# EAGLE board lpc1347_refboard (EAGLE 6.4)
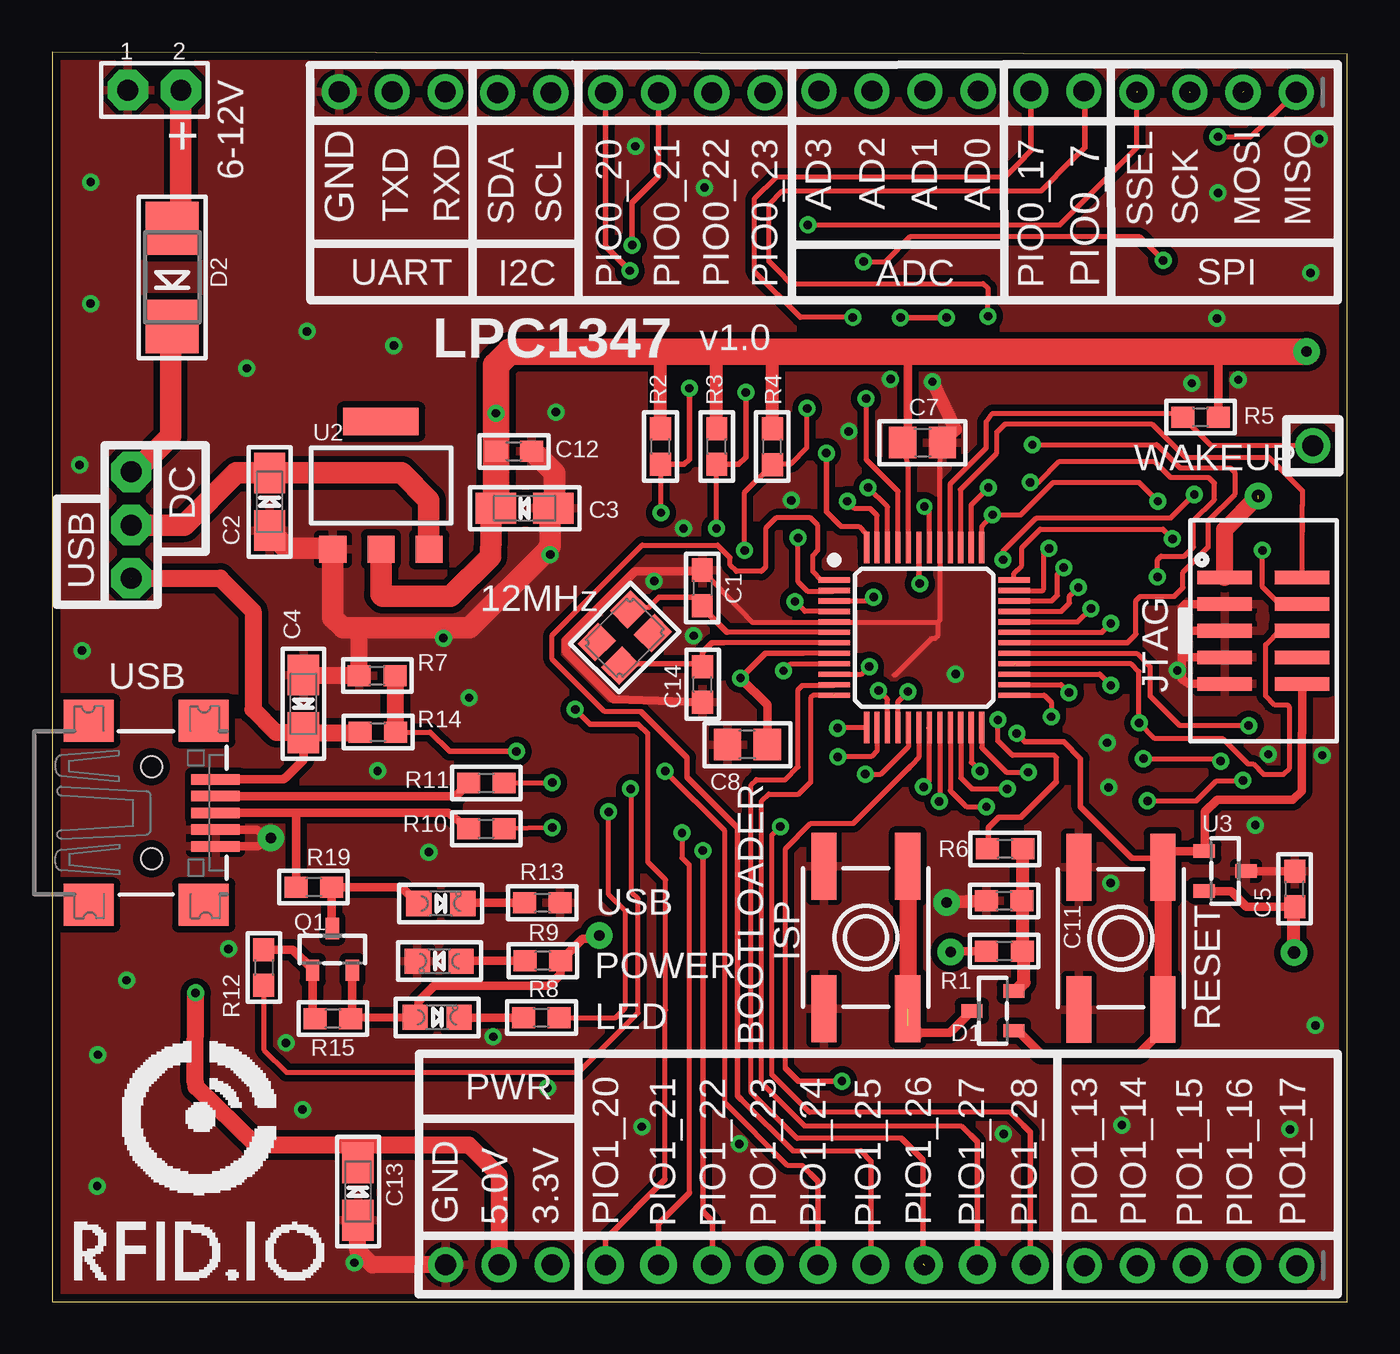
[diagram p0: board, top side]
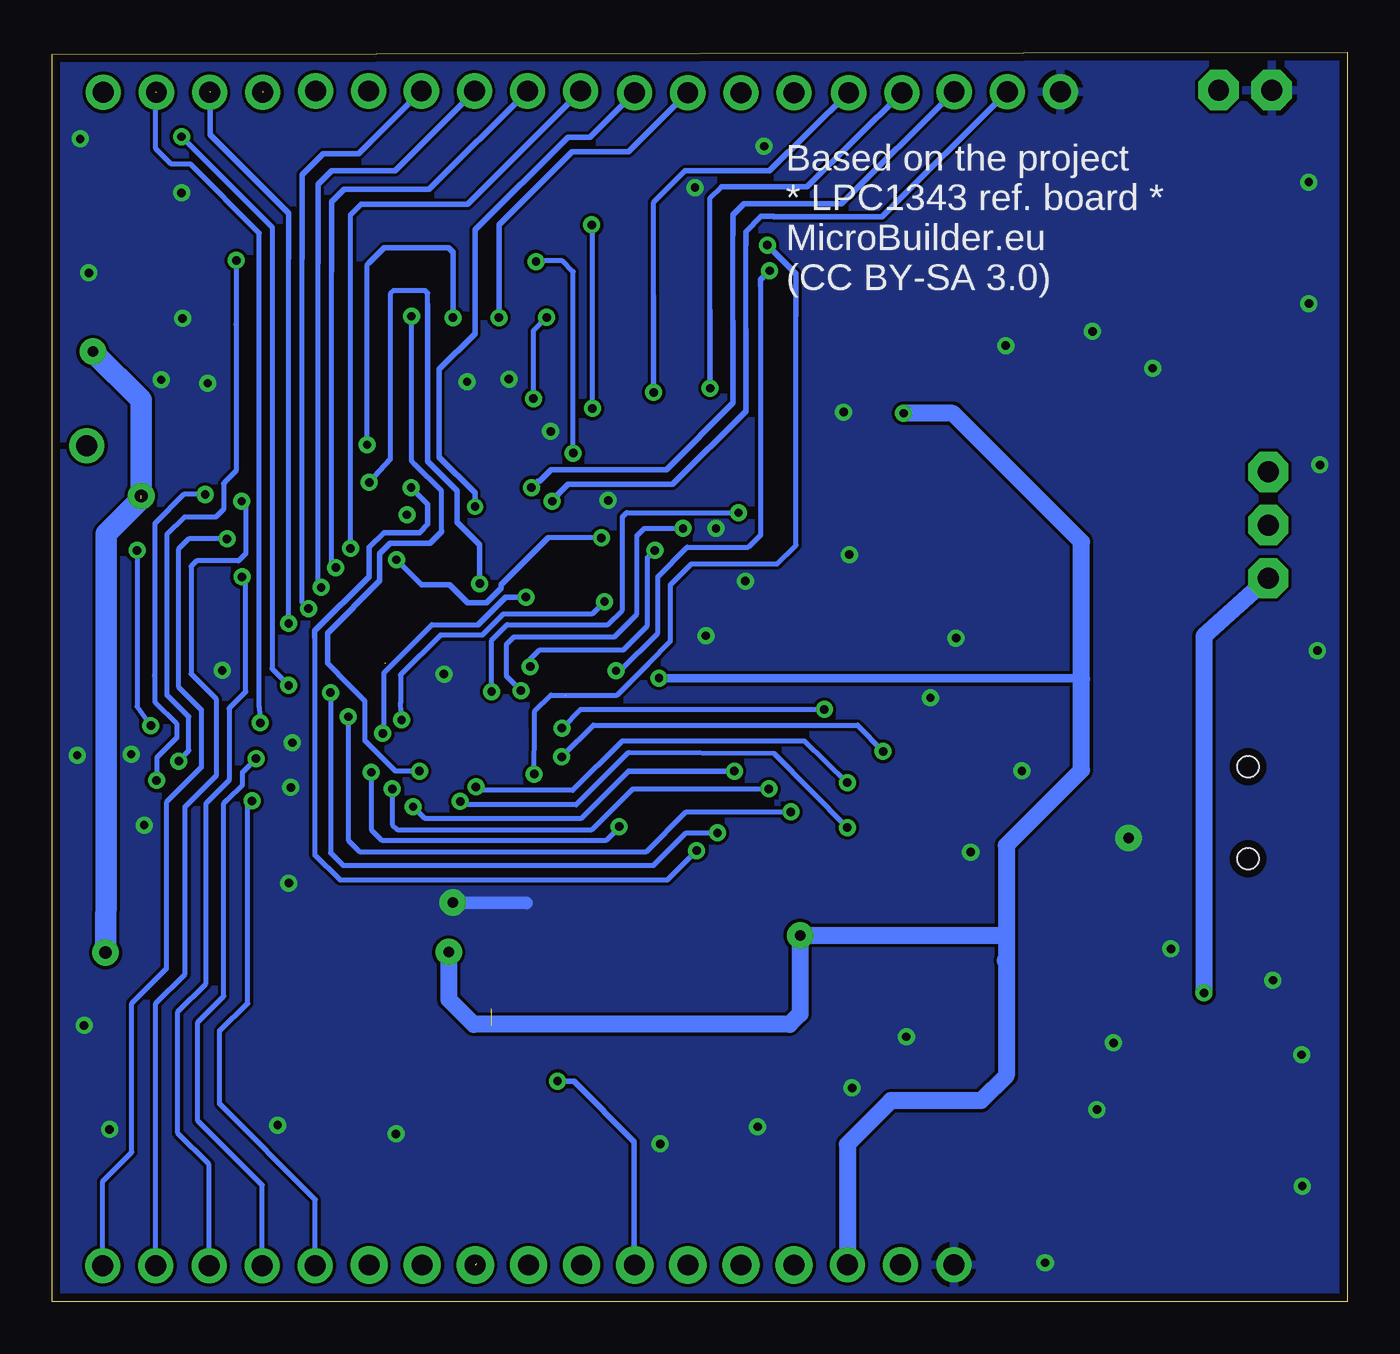
[diagram p1: board, bottom side, seen from below]

Size 61.9 x 59.7 mm. Coordinates in mm from the lower left corner, seen from the top.
Outline: 61.9,0 61.9,59.6 0,59.7 0,0 61.9,0
Copper layers (1*16): Top 0.0356mm / dielectric 1.5011mm / Bottom 0.0356mm
Design rules "oshpark.com": minimum track width 6mil, minimum drill 13mil, track to track 6mil, track to pad 6mil, pad to pad 6mil, via to via 6mil, smd to smd 6mil, copper to edge 15mil, drill to drill 6mil, minimum pad ring 7mil, minimum via ring 7mil, stop-mask expansion 4mil, vias tented up to drill 0mil, thermal gap 10mil

## Footprints (pad centres in the part's own frame; a part is rotated, then mirrored left to right if it is on the bottom)
EVQ-Q2 = smd 3.2 x 1.2: A -3.4,-2; A' 3.4,-2; B -3.4,2; B' 3.4,2
0603 = smd 1.1 x 1: 1 -0.85,0; 2 0.85,0
EIA3216-18/A-R = smd 1.95 x 1.5: + 1.375,0; - -1.375,0
0805 = smd 1.3 x 1.5: 1 -0.95,0; 2 0.95,0
USB-MINIB = smd 0.5 x 2.308: D+ 0,4.064; D- -0.8,4.064; GND 1.6,4.064; ID 0.8,4.064; VBUS -1.6,4.064 | smd 2 x 2.4: GND1 -4.4,-2; GND2 -4.4,3.5; GND3 4.4,3.5; GND4 4.4,-2 | hole 1: -2.2,1; 2.2,1
SOT23-R = smd 0.635 x 1.016: 1 -0.95,-1; 2 0.95,-1; 3 0,1
SMADIODE = smd 2.54 x 2.54: A 2.349,0; C -2.349,0
1X03_ROUND = drill 1 pad 1.676: 1 -2.54,0; 2 0,0; 3 2.54,0
1X04_ROUND = drill 1 pad 1.676: 1 -3.81,0; 2 -1.27,0; 3 1.27,0; 4 3.81,0
1X02_ROUND = drill 1 pad 1.676: 1 -1.27,0; 2 1.27,0
1X01_ROUND = drill 1 pad 1.676: 1 0,0
1X05_ROUND = drill 1 pad 1.676: 1 -5.08,0; 2 -2.54,0; 3 0,0; 4 2.54,0; 5 5.08,0
JUMPER2 = drill 1 pad 1.93 octagon: 1 2.54,0; 2 0,0
1X09_ROUND_70 = drill 1 pad 1.778: 1 -10.16,0; 2 -7.62,0; 3 -5.08,0; 4 -2.54,0; 5 0,0; 6 2.54,0; 7 5.08,0; 8 7.62,0; 9 10.16,0
JUMPER3 = drill 1 pad 1.93 octagon: 1 -2.54,0; 2 0,0; 3 2.54,0
2X05_1.27MM_SMT = smd 0.65 x 2.6: 1 -2.54,-1.85; 2 -2.54,1.85; 3 -1.27,-1.85; 4 -1.27,1.85; 5 0,-1.85; 6 0,1.85; 7 1.27,-1.85; 8 1.27,1.85; 9 2.54,-1.85; 10 2.54,1.85
CHIPLED_0805 = smd 1.2 x 1.2: A 0,-1.05; C 0,1.05
SOT223-R = smd 1.3 x 1.3: 1 -2.3,-3.05; 2 0,-3.05; 3 2.3,-3.05 | smd 3.6 x 1.3: 4 0,3.05
LQFP48 = smd 1.5 x 0.25: 1 -4.3,2.75; 2 -4.3,2.25; 3 -4.3,1.75; 4 -4.3,1.25; 5 -4.3,0.75; 6 -4.3,0.25; 7 -4.3,-0.25; 8 -4.3,-0.75; 9 -4.3,-1.25; 10 -4.3,-1.75; 11 -4.3,-2.25; 12 -4.3,-2.75; 25 4.3,-2.75; 26 4.3,-2.25; 27 4.3,-1.75; 28 4.3,-1.25; 29 4.3,-0.75; 30 4.3,-0.25; 31 4.3,0.25; 32 4.3,0.75; 33 4.3,1.25; 34 4.3,1.75; 35 4.3,2.25; 36 4.3,2.75 | smd 0.25 x 1.5: 13 -2.75,-4.3; 14 -2.25,-4.3; 15 -1.75,-4.3; 16 -1.25,-4.3; 17 -0.75,-4.3; 18 -0.25,-4.3; 19 0.25,-4.3; 20 0.75,-4.3; 21 1.25,-4.3; 22 1.75,-4.3; 23 2.25,-4.3; 24 2.75,-4.3; 37 2.75,4.3; 38 2.25,4.3; 39 1.75,4.3; 40 1.25,4.3; 41 0.75,4.3; 42 0.25,4.3; 43 -0.25,4.3; 44 -0.75,4.3; 45 -1.25,4.3; 46 -1.75,4.3; 47 -2.25,4.3; 48 -2.75,4.3
CRYSTAL_3.2X2.5 = smd 1.4 x 1.2: 1 -1.1,-0.8; 2 1.1,0.8; GND1 -1.1,0.8; GND2 1.1,-0.8

## Placement (x,y rotation side)
BTN1  Reset  [EVQ-Q2]  51.08,17.36 270 top
BTN2  ISP  [EVQ-Q2]  38.89,17.4 270 top
C1  16pF  [0603]  31.07,34.11 270 top
C2  10µF  [EIA3216-18/A-R]  10.39,38.22 90 top
C3  10µF  [EIA3216-18/A-R]  22.58,37.91 180 top
C4  10µF  [EIA3216-18/A-R]  12,28.57 270 top
C5  0.1µF  [0603]  59.39,19.72 90 top
C7  10µF  [0805]  41.6,41.05 0 top
C8  10µF  [0805]  33.23,26.62 180 top
C11  0.1µF  [0603]  45.5,19.15 180 top
C12  0.1µF  [0603]  22.06,40.63 0 top
C13  10µF  [EIA3216-18/A-R]  14.61,5.26 90 top
C14  16pF  [0603]  31.09,29.49 90 top
CN1  USBMINIB  [USB-MINIB]  3.74,23.36 270 top
D1  BAT54C  [SOT23-R]  44.96,13.89 90 top
D2  MULTICOMPSS12  [SMADIODE]  5.74,48.95 90 top
JP1  PWR  [1X03_ROUND]  21.35,1.77 180 top
JP2  ADC  [1X04_ROUND]  40.45,57.85 180 top
JP3  SPI  [1X04_ROUND]  55.65,57.79 180 top
JP4  I2C  [1X02_ROUND]  22.56,57.77 180 top
JP5  UART  [1X03_ROUND]  16.25,57.81 0 top
JP6  WAKEUP  [1X01_ROUND]  60.25,40.9 90 top
JP7  [1X04_ROUND]  30.25,57.78 180 top
JP9  [1X05_ROUND]  54.41,1.72 180 top
JP10  [JUMPER2]  6.15,57.9 180 top
JP11  [1X09_ROUND_70]  36.6,1.75 0 top
JP12  POWERSOURCE  [JUMPER3]  3.77,37.11 90 top
JP13  [1X02_ROUND]  48.05,57.85 0 top
JTAG1  JTAG  [2X05_1.27MM_SMT]  57.9,32.06 270 top
LED1  POWER  [CHIPLED_0805]  18.5,16.27 90 top
LED2  2mA  [CHIPLED_0805]  18.4,13.59 270 top
LED3  USB  [CHIPLED_0805]  18.57,19.03 270 top
Q1  MMBT2907A  [SOT23-R]  13.39,16.83 0 top
R1  20K  [0603]  45.51,16.75 180 top
R2  10K  [0603]  29.08,40.86 90 top
R3  10K  [0603]  31.76,40.86 90 top
R4  10K  [0603]  34.42,40.85 90 top
R5  10K  [0603]  54.88,42.27 0 top
R6  1K  [0603]  45.54,21.63 180 top
R7  100K  [0603]  15.53,29.92 0 top
R8  1.0K  [0603]  23.38,13.57 0 top
R9  150  [0603]  23.45,16.29 180 top
R10  33  [0603]  20.74,22.6 0 top
R11  33  [0603]  20.74,24.78 0 top
R12  2K  [0603]  10.11,15.97 270 top
R13  150  [0603]  23.43,19.06 180 top
R14  10K  [0603]  15.57,27.22 0 top
R15  10K  [0603]  13.42,13.52 180 top
R19  1.5K  [0603]  12.5,19.81 180 top
U2  LM1117(3.3)  [SOT223-R]  15.71,39 0 top
U3  MCP130T  [SOT23-R]  56.06,20.58 270 top
U4  LPC1347FBD48  [LQFP48]  41.68,31.73 0 top
U$23  [RFID_IO_LOGO_1X1]  1.11,1.08 0 top
Y2  12MHz  [CRYSTAL_3.2X2.5]  27.37,31.73 45 top

## Library data of the parts
BTN1 BTN2 JP2-JP5 JP7 JP9-JP11 JP13 U4 = microbuilder (1)
C1-C5 C7 C8 C11-C14 CN1 D1 D2 JP1 JP6 JP12 JTAG1 LED1-LED3 Q1 R1-R15 R19 U2 U3 Y2 = microbuilder
U$23 = rfid.io

## Nets
3.3V: C3.+ C5.1 C7.1 C8.1 C12.1 JP1.1 JTAG1.1 LED2.A Q1.2 R1.2 R2.2 R3.2 R4.2 R5.2 R9.1 R15.1 U2.2 U3.2 U4.8 U4.44
5.0V: C4.+ C13.+ CN1.VBUS JP1.2 JP12.1 R14.1
GND: BTN1.A BTN1.A' BTN2.A BTN2.A' C1.1 C2.- C3.- C4.- C5.2 C7.2 C8.2 C11.2 C12.2 C13.- C14.1 CN1.GND CN1.ID JP1.3 JP5.1 JP10.1 JTAG1.3 JTAG1.5 JTAG1.7 JTAG1.9 LED1.C R7.1 R13.1 U2.1 U3.3 U4.5 U4.41
N$1: LED2.C R8.1
N$2: C2.+ JP12.2 U2.3
N$4: D2.A JP10.2
N$5: BTN2.B BTN2.B' D1.3
N$7: CN1.D+ R10.1 R19.2
N$8: Q1.1 R12.1 R15.2
N$9: C11.1 D1.2 R1.1 R6.1
N$10: LED1.A R9.2
N$11: LED3.C R13.2
N$12: CN1.D- R11.1
N$13: LED3.A Q1.3 R19.1
PIO0_0/RESET: BTN1.B BTN1.B' D1.1 JTAG1.10 U3.1 U4.3
PIO0_1/ISP: R6.2 U4.4
PIO0_2/SSEL: JP3.4 R4.1 U4.10
PIO0_3/USBVBUS: R7.2 R14.2 U4.14
PIO0_4/SCL: JP4.1 R3.1 U4.15
PIO0_5/SDA: JP4.2 R2.1 U4.16
PIO0_6/USBCONNECT: R12.2 U4.22
PIO0_7: JP13.2 U4.23
PIO0_8/MISO: JP3.1 U4.27
PIO0_9/MOSI/SWO: JP3.2 JTAG1.6 U4.28
PIO0_10/SWCLK: JTAG1.4 U4.29
PIO0_11/AD0: JP2.1 U4.32
PIO0_12/AD1: JP2.2 U4.33
PIO0_13/AD2: JP2.3 U4.34
PIO0_14/AD3: JP2.4 U4.35
PIO0_15/SWDIO: JTAG1.2 U4.39
PIO0_16/WAKEUP: JP6.1 R5.1 U4.40
PIO0_17: JP13.1 U4.45
PIO0_18/RXD: JP5.3 U4.46
PIO0_19/TXD: JP5.2 U4.47
PIO0_20: JP7.4 U4.9
PIO0_21: JP7.3 U4.17
PIO0_22: JP7.2 U4.30
PIO0_23: JP7.1 U4.42
PIO1_13: JP9.1 U4.36
PIO1_14: JP9.2 U4.37
PIO1_15: JP9.3 U4.43
PIO1_16: JP9.4 U4.48
PIO1_19: JP9.5 U4.2
PIO1_20: JP11.1 U4.13
PIO1_21: JP11.2 U4.26
PIO1_22: JP11.3 U4.38
PIO1_23: JP11.4 U4.18
PIO1_24: JP11.5 U4.21
PIO1_25: JP11.6 U4.1
PIO1_26: JP11.7 U4.11
PIO1_27: JP11.8 U4.12
PIO1_28: JP11.9 U4.24
PIO1_29/SCK: JP3.3 U4.31
PIO1_31/LED: R8.2 U4.25
USBD+: R10.2 U4.20
USBD-: R11.2 U4.19
VCC: D2.C JP12.3
XTALIN: C1.2 U4.6 Y2.2
XTALOUT: C14.2 U4.7 Y2.1

## Tracks (layer width: path | path; a pad name or v marks a point on that pad's centre or on a via)
3.3V  (via drill 0.4 pad 0.81, 0.5 pad 1.27, 0.6 pad 1.27)  (1 unrouted)
  Top 0.25: U4.44 40.93,39.93 C7.1 40.9,40.44 | U4.8 35.88,30.98
  Top 0.254: 40.9,45.1 40.6,45.4 | 40.9,41.29 C7.1 | 35.88,30.98 34.08,30.98 v32.9,29.8
  Top 0.406: 14.25,13.55 14.2,13.5 14.2,13.4 14.34,13.54 Q1.2 14.34,13.6 R15.1 14.31,13.57 LED2.A 17.5,13.61 17.5,14.35 18.25,15.1 23.75,15.1 24.3,15.65 R9.1 25.35,17.35 26,17.35 v26.15,17.5 | C5.1 57.08,18.87 56.35,19.6 55.09,19.6 U3.2 | C8.1 34.18,28.52 v32.9,29.8 | R5.2 55.73,45.18 55.96,45.4 | 40.9,41.29 40.9,45 41.3,45.4 | R1.2 43,16.75 v42.95,16.7
  Top 0.61: 31.85,45.4 31.76,45.31 R3.2 | R2.2 29.08,45.27 28.95,45.4 | R4.2 34.42,45.33 34.35,45.4 | v59.35,16.68 59.35,18.83 C5.1
  Top 0.813: JTAG1.1 56.05,36.9 v57.65,38.5
  Top 1.016: U2.2 15.71,33.79 15.8,33.7 19.05,33.7 20.95,35.6 21,37.71 C3.+
  Top 1.27: C12.1 v21.2,42.45 21.2,44.75 21.85,45.4 28.95,45.4 31.85,45.4 34.35,45.4 40.6,45.4 41.3,45.4 55.96,45.4 v59.96,45.4 | C3.+ C12.1 | C12.1
  Bottom 0.406: v32.9,29.8 12.75,29.8 12.7,29.75
  Bottom 0.61: 21.13,42.38 v21.2,42.45
  Bottom 0.813: 16.3,17.55 16.3,21.8 12.7,25.4 12.7,29.75 12.7,36.3 18.85,42.45 v21.2,42.45 | 16.3,17.55 16.3,16.25 | 16.3,16.25 16.3,10.8 17.5,9.6 21.82,9.6 23.9,7.52 JP1.1 | v42.95,16.7 42.95,14.45 41.75,13.25 26.65,13.25 26.15,13.75 v26.15,17.5 16.35,17.5 16.3,17.55 | 16.35,16.3 16.3,16.25
  Bottom 1.016: v59.35,16.68 59.33,20.65 59.33,36.7 57.65,38.38 57.65,43.09 v59.96,45.4
5.0V  (via drill 0.4 pad 0.81)  (1 unrouted)
  Top 0.406: CN1.VBUS 11.05,24.96 11.12,25.03 11.15,25.03 12,25.88 C4.+
  Top 0.813: JP12.1 8.03,34.57 9.6,33 9.6,28.3 10.71,27.19 C4.+ 14.69,27.19 R14.1 | v6.85,14.75 6.84,10.46 6.88,10.26 9.71,7.49 14.45,7.49 | 14.45,7.49 19.91,7.49 21.35,6.05 JP1.2 | C13.+ 14.45,6.8 14.45,7.49
  Bottom 0.813: JP12.1 6.85,31.8 v6.85,14.75
GND  (via drill 0.4 pad 0.81, 0.5 pad 1.27)
  Top 0.25: C7.2 42.43,40.07 U4.41 42.43,32.58 42.3,32.45 | 37.39,32.5 U4.5 37.41,32.45 | 40.25,29.95 40.3,29.95 42.05,31.7 42.2,31.7 42.35,31.85 42.35,32.4 42.3,32.45 | 37.41,32.45 33.49,32.45 C1.1 | 42.3,32.45 37.41,32.45
  Top 0.406: JTAG1.3 54.13,33.33 54,33.15 54,32.05 | 54,32.05 56.04,32.05 JTAG1.5 | JTAG1.9 54.33,29.52 54,29.75 54,30.8 | 54,30.8 54,32.05 | JTAG1.7 54.01,30.79 54,30.8 | U3.3 59.38,20.58 C5.2 | CN1.GND 9.81,21.76 v10.44,22.16 9.77,22.56 CN1.ID | C14.1 26.83,28.77 24.55,31.05 24.55,31.6 27.85,34.9 31.04,34.9 C1.1
  Top 0.61: 14.87,32.11 14.96,32.2 | C11.2 43.69,19.11 v42.76,19.08 | v42.08,43.96 43.18,41.67 C7.2
  Top 0.813: C4.- 14.65,29.94 R7.1 14.68,31.92 14.87,32.11 | C13.- 14.6,3.07 14.6,2.45 15.29,1.76 JP1.3
  Top 1.016: C2.- 10.39,36.81 11.2,36 13.37,36 U2.1 13.41,32.69 13.9,32.2 14.96,32.2 19.95,32.2 23.5,35.75 23.8,36.1 23.8,37.76 C3.- | 24,37.87 C3.- | C12.2 22.97,40.63 24,39.6 24,37.96 C3.-
  Bottom 0.61: v42.76,19.08 39.25,19.05
  other vias: 9.3,44.6 23.8,35.7 30.66,31.82 60.71,26.11 60.38,13.2 51.13,8.44 50.59,20 57.51,22.77 32.85,7.54 2.15,5.52 14.44,1.86 2.18,11.8 21.07,12.66 18,21.48 3.55,15.36 11.96,9.18 8.42,16.86 11.17,12.36 28.77,34.44 15.55,25.36 19.93,28.86 1.43,31.11 1.3,39.98 1.82,47.69 1.83,53.5 60.57,55.57 16.32,45.69 12.17,46.36 38.08,41.59 30.18,36.95 24.07,42.51 55.68,46.98 18.7,31.71 60.15,49.16 43.18,29.98 53.78,30.16 50.43,26.71 58.13,26.16 54.48,43.89 55.73,52.98 40.08,44.09 35.33,38.29 23.67,10.21 28.18,8.36 59.16,8.23 45.47,8.01 50.5,24.57 31.18,53.23 27.88,55.21 56.7,44.05
  pour Top (isolate 0.305): 0.4,0.35 61.45,0.35 61.45,59.15 0.4,59.15
  pour Bottom: 0.4,0.35 61.45,0.35 61.45,59.15 0.4,59.15
N$1
  Top 0.406: R8.1 19.57,13.57 LED2.C
N$2
  Top 1.016: U2.3 18,35.87 18,38.3 16.7,39.6 C2.+ 8.8,39.6 6.31,37.11 JP12.2
N$4
  Top 1.016: 5.75,50.9 5.6,50.75 5.6,51.16 D2.A 6.15,51.71 JP10.2
N$5  (1 unrouted)
  Top 0.406: 41.23,12.84 42.91,12.84 D1.3
  Top 0.813: BTN2.B 40.89,13.19 41.23,12.84
N$7
  Top 0.406: CN1.D+ 11.63,23.36 | 11.63,23.36 18.93,23.36 R10.1 | R19.2 11.65,23.34 11.63,23.36
N$8
  Top 0.406: R12.1 11.5,16.82 12.44,15.88 Q1.1 12.44,13.65 R15.2
N$9
  Top 0.61: 46.45,16.83 R1.1 | 46.46,16.85 R1.1 | D1.2 46.04,14.84 46.45,15.25 46.45,16.66 R1.1 | R6.1 46.36,21.63 46.36,19.15 | R1.1 46.36,19.15 | C11.1 46.36,19.15
N$10
  Top 0.406: R9.2 19.57,16.29 LED1.A
N$11
  Top 0.406: R13.2 19.65,19.06 LED3.C
N$12
  Top 0.406: CN1.D- 19.27,24.16 R11.1
N$13
  Top 0.406: Q1.3 13.35,17.87 R19.1 16.7,19.8 17.47,19.03 LED3.A
PIO0_0/RESET  (via drill 0.4 pad 0.81)
  Top 0.25: U4.3 39.08,33.48 v39.26,33.67
  Top 0.254: v46.1,27.15 46.5,26.75 48.35,26.75 49.15,25.95 49.15,23.65 51.6,21.2 52.64,21.2 BTN1.B
  Top 0.406: 53.38,21.53 U3.1 55.1,21.56 55.1,23.4 55.68,23.98 59.3,23.98 59.72,24.4 59.72,27.17 59.75,27.2 JTAG1.10 | D1.1 46.16,12.94 47.25,11.85 51.94,11.85 53.08,12.99 BTN1.B' | 52.72,21.53 53.38,21.53 | 53.38,21.53 53.39,21.52 52.93,21.52 BTN1.B
  Top 0.813: 53.05,20.91 BTN1.B BTN1.B'
  Bottom 0.25: v46.1,27.15 46.05,27.2 46.05,30.05 43.75,32.35 41.55,32.35
  Bottom 0.254: 39.33,33.67 v39.26,33.67 40.23,33.67 41.55,32.35
PIO0_1/ISP  (via drill 0.4 pad 0.81)
  Top 0.25: U4.4 35.97,32.98 v35.5,33.45 | 48,24.85 48,26 47.9,26.1 45.9,26.1 45.2,26.8 v45.2,27.8
  Top 0.254: 48,24.85 46.3,23.15 45.25,23.15 44.75,22.65 44.75,21.69 R6.2
  Top 0.305: R6.2 44.85,21.79
  Bottom 0.25: v35.5,33.45 36.1,32.85 40.35,32.85 41.35,31.85 43.35,31.85 45.25,29.95 45.25,28.6 v45.2,27.8
PIO0_2/SSEL  (via drill 0.4 pad 0.81)  (1 unrouted)
  Top 0.25: U4.10 38.68,29.98 v39.05,30.35 | v33.1,35.9 33.1,38.68 R4.1 34.47,40.05 35.33,40.05 36.07,40.79 36.07,42.67 v36.08,42.68 | v36.11,51.45 48.17,51.45 51.85,55.13 51.85,57.84
  Bottom 0.25: v39.05,30.35 39.05,30.7 38.6,31.15 34.6,31.15 33.45,32.3 33.45,35.55 v33.1,35.9 | v36.08,42.68 36.08,51.42 v36.11,51.45
PIO0_3/USBVBUS  (via drill 0.4 pad 0.81)
  Top 0.25: R14.2 18.06,27.22 | U4.14 39.43,26.33 39.15,26.05 37.57,26.05 v37.55,26.03
  Top 0.254: 18.06,27.22 18.99,26.29 v22.19,26.29
  Top 0.813: R7.2 16.38,27.26 R14.2
  Bottom 0.25: v22.19,26.29 23.4,27.55 36.03,27.55 v37.55,26.03
PIO0_4/SCL  (via drill 0.4 pad 0.81)
  Top 0.25: 39.9,27.41 U4.15 | 39.92,27.28 U4.15 | U4.15 39.93,28.77 v39.5,29.2 | v31.75,36.95 31.75,40 R3.1
  Top 0.254: R3.1 32.81,40.01 33.15,40.35 v33.15,43.45
  Bottom 0.25: v31.75,36.95 33.6,36.95 33.95,36.6 33.95,32.85 35.05,31.75 39.85,31.75 40.2,31.4 40.2,29.9 v39.5,29.2 | 33.15,48.05 33.15,52.53 31.65,54.03
  Bottom 0.254: v33.15,43.45 33.15,48.05 | 31.65,54.03 27.63,54.03 JP4.1
PIO0_5/SDA  (via drill 0.4 pad 0.81)
  Top 0.25: 40.43,27.41 U4.16 40.43,28.68 v40.9,29.15 | v29.1,37.7 29.1,39.98 R2.1
  Top 0.254: R2.1 30.21,40.01 30.45,40.25 v30.45,43.65
  Bottom 0.25: v40.9,29.15 40.9,31.6 40.15,32.35 35.35,32.35 34.65,33.05 34.65,37.5 34.45,37.7 v29.1,37.7 | 30.45,47.35 30.45,52.74 29.91,53.28
  Bottom 0.254: v30.45,43.65 30.45,47.35 | 29.91,53.28 25.84,53.28 JP4.2
PIO0_6/USBCONNECT  (via drill 0.4 pad 0.81)
  Top 0.25: R12.2 10.11,12.04 11.2,10.95 25.15,10.95 28,13.8 28,19.25 27.7,19.55 27.7,24.45 v27.65,24.5 | U4.22 43.43,25.02 43.95,24.5 v45.65,24.5
  Bottom 0.25: v27.65,24.5 34.15,24.5 36.1,22.55 45.4,22.55 45.65,22.8 v45.65,24.5
PIO0_7  (via drill 0.4 pad 0.81)
  Top 0.25: U4.23 43.93,25.77 v44.35,25.35 | 48.75,54.56 47.27,53.08 34.91,53.08 34.25,52.42 34.25,49.71 34.99,48.97 34.99,48.96 35.31,48.64 44.49,48.64 44.74,48.4 v44.73,47.09
  Top 0.254: 48.75,54.56 48.76,54.56 49.35,55.15 49.35,57.82 JP13.2
  Bottom 0.25: v44.35,25.35 45.5,25.35 46.95,26.8 46.95,28.7 47.73,29.47 47.78,29.53 | 43.3,36.83 43.3,38.75 44.55,40 44.73,40.18 44.73,47.13 v44.73,47.09
  Bottom 0.254: 43.3,36.83 43.3,36.8 43.85,36.25 45.75,36.25 46.25,35.75 46.25,34.45 48.75,31.95 48.75,30.5 47.73,29.47
PIO0_8/MISO  (via drill 0.4 pad 0.81)
  Top 0.25: U4.27 50.07,29.98 v50.6,29.45 | 59.47,57.81 JP3.1 57.27,55.66 v55.72,55.66
  Bottom 0.25: 51.39,30.23 51.4,30.25 | v55.72,55.66 51.56,51.5 51.55,51.5 51.39,51.33 51.39,30.23 | 51.39,30.23 v50.6,29.45
PIO0_9/MOSI/SWO  (via drill 0.4 pad 0.81)  (2 unrouted)
  Top 0.25: 45.99,30.5 U4.28 | JTAG1.6 58.66,32.06 58,31.4 58,28.95 58.45,28.5 59.05,28.5 59.15,28.4 59.15,25.5 58.85,25.2 57.9,25.2 57.4,25.7 57.15,25.7 55.95,26.9 52.71,26.9 v51.96,27.65 51.95,27.8 51.95,30.1 51.58,30.48 46.01,30.48
  Bottom 0.25: v51.96,27.65 52,28.41 52,51.06 55.3,54.36 56.21,54.36 56.95,55.09 56.95,57.82
PIO0_10/SWCLK  (via drill 0.4 pad 0.81)
  Top 0.25: JTAG1.4 58.57,33.33 58.57,33.43 57.85,34.15 v57.85,35.9 | U4.29 51.84,30.98 52.47,30.35 52.47,28.95 53.89,27.53 v57.19,27.53
  Bottom 0.25: v57.85,35.9 57.85,28.43 v57.19,27.53
PIO0_11/AD0  (via drill 0.4 pad 0.81)
  Top 0.25: U4.32 49.01,32.48 v49.65,33.12
  Bottom 0.25: v49.65,33.12 49.65,33.1 49.95,33.4 49.95,49.85
  Bottom 0.254: 49.95,49.85 49.95,53.85 48.95,54.85 47.26,54.85 JP2.1
PIO0_12/AD1  (via drill 0.4 pad 0.81)
  Top 0.25: U4.33 48.23,32.98 48.63,33.38 48.63,33.71 v49.05,34.13
  Bottom 0.25: v49.05,34.13 49.2,34.28 49.2,49.65
  Bottom 0.254: 49.2,49.65 49.2,53.4 48.55,54.05 45.52,54.05 JP2.2
PIO0_13/AD2  (via drill 0.4 pad 0.81)
  Top 0.25: U4.34 47.78,33.48 48.05,33.75 48.05,34.78 v48.35,35.08
  Bottom 0.25: v48.35,35.08 48.55,35.15 48.55,49.25
  Bottom 0.254: 48.55,49.25 48.55,52.55 47.95,53.15 43.88,53.15 JP2.3
PIO0_14/AD3  (via drill 0.4 pad 0.81)
  Top 0.25: U4.35 47.33,33.98 47.4,34.05 47.4,35.74 v47.65,35.99
  Bottom 0.25: v47.65,35.99 47.65,51.94 47.14,52.45
  Bottom 0.254: 47.14,52.45 42.04,52.45 JP2.4
PIO0_15/SWDIO
  Top 0.25: JTAG1.2 59.75,36.8 | U4.39 43.4,36.06 43.4,38.8 45.15,40.55 45.15,41.55 45.55,41.95 52.55,41.95 54.15,40.35 58.15,40.35 59.76,38.76 59.76,38.06 59.75,38.05 59.75,37.35
  Top 0.254: 59.75,36.8 59.75,37.25 59.75,37.35
PIO0_16/WAKEUP
  Top 0.25: U4.40 42.93,39.08 44.65,40.8 44.65,42.05 44.95,42.45 53.75,42.45 R5.1 55.4,40.9 JP6.1
PIO0_17  (via drill 0.4 pad 0.81)
  Top 0.25: U4.45 40.43,38.72 38.9,40.25 v38.9,43.15 | 46.15,54.35 45.56,53.76 34.61,53.76 33.57,52.72 33.57,49.22 35.76,47.03 v38.26,47.03
  Top 0.254: 46.15,54.35 46.78,54.99 JP13.1
  Bottom 0.25: v38.9,43.15 38.9,46.39 v38.26,47.03
PIO0_18/RXD  (via drill 0.4 pad 0.81)
  Top 0.25: U4.46 39.93,37.97 v39,38.9
  Bottom 0.25: 38.7,39.2 v39,38.9 | 29.35,46.85 29.35,50.98
  Bottom 0.254: 38.7,39.2 38.6,39.2 38.05,39.75 32.55,39.75 29.35,42.95 29.35,46.85 | JP5.3 24.18,52.46 28.83,52.46 29.35,51.94 29.35,50.98
PIO0_19/TXD  (via drill 0.4 pad 0.81)
  Top 0.25: U4.47 39.43,37.57 39.1,37.9 38.35,37.9 v38,38.25
  Bottom 0.25: v38,38.25 37.75,38.5 | 28.75,46.45 28.75,50.51
  Bottom 0.254: 37.75,38.5 37.75,38.55 37.25,39.05 32.25,39.05 28.75,42.55 28.75,46.45 | JP5.2 22.25,51.85 27.41,51.85 27.42,51.86 28.02,51.86 28.75,51.13 28.75,50.51
PIO0_20  (via drill 0.4 pad 0.81)
  Top 0.25: v34.95,30.15 v34.96,30.15 35.29,30.48 U4.9
  Top 0.254: JP7.4 26.45,50.42 v27.61,49.27
  Bottom 0.25: 28.04,48.54 28.04,36.63 28.63,36.05 31.55,36.05 32.95,34.65 32.95,31.95 34.75,30.15 v34.95,30.15
  Bottom 0.254: 28.04,48.54 28.04,48.83 v27.61,49.27
PIO0_21  (via drill 0.4 pad 0.81)
  Top 0.25: U4.17 40.93,26.53 39.61,25.21 v38.86,25.21
  Top 0.254: JP7.3 28.98,53.79 27.72,52.52 v27.72,50.49
  Bottom 0.25: v38.86,25.21 38.85,27.45 38.86,27.46 38.86,28.18 38.06,28.98 34.91,28.98 33.41,30.48 33.41,30.49 32.35,31.55 32.35,34.25 31.35,35.25 27.25,35.25 26.35,36.15 26.35,47.13
  Bottom 0.254: 26.35,47.13 26.35,49.12 v27.72,50.49
PIO0_22  (via drill 0.4 pad 0.81)
  Top 0.25: v46.85,40.95 52.8,40.95 53.91,39.84 56.32,39.84 56.52,39.64 56.52,38.56 55.24,37.28 55.24,36.04 54.05,34.85 54.05,34.12 53.63,33.7 52,33.7 51.8,33.5 51.8,31.9 51.38,31.48
  Top 0.254: U4.30 51.38,31.48 | v42.75,47.02 v40.55,47.02
  Bottom 0.25: v46.85,40.95 46.85,49.55 46.75,49.65
  Bottom 0.254: 46.75,49.65 46.05,50.35 42.95,50.35 42.75,50.15 v42.75,47.02 | v40.55,47.02 40.55,51.45 37.05,54.95 34.35,54.95 JP7.2
PIO0_23  (via drill 0.4 pad 0.7)
  Top 0.25: U4.42 41.93,37.75 v41.69,37.99
  Bottom 0.254: v41.69,37.99 v41.7,38 41.7,38.65 43.4,40.35 43.4,44.55 41.69,46.26 41.69,51.21 37.25,55.65 36.19,55.65 JP7.1
PIO1_13  (via drill 0.4 pad 0.81)
  Top 0.25: U4.36 45.98,34.81 46.34,35.17 46.34,36.02 47.23,36.91 53.09,36.91 v53.55,36.45
  Bottom 0.25: v53.55,36.45 55.38,36.45 55.88,35.95 55.88,29.39 54.78,28.29 54.78,25.53 56.45,23.86 56.45,15.9 58.1,14.25 58.1,7.15 59.49,5.76 JP9.1
PIO1_14  (via drill 0.4 pad 0.81)
  Top 0.25: U4.37 44.43,37.03 v44.95,37.6 46.3,37.6 47.85,39.15 51.95,39.15 v52.85,38.25
  Bottom 0.25: v52.85,38.25 52.65,38.05 52.65,35.75 53,35.4 55.01,35.4 55.27,35.14 55.27,30 54.07,28.8 54.07,25.13 55.55,23.65 55.55,15.65 56.95,14.25 JP9.2
PIO1_15  (via drill 0.4 pad 0.81)
  Top 0.25: v46.75,39.15 47.15,39.15 48.15,40.15 52.69,40.15 53.46,39.38 54.98,39.38 55.29,39.37 55.55,39.11 55.55,38.33 54.55,37.33 54.55,36.05 54.12,35.62 53,35.62 52.83,35.45 v52.83,34.63
  Top 0.254: U4.43 41.43,34.35 v41.47,34.31
  Bottom 0.25: v52.83,34.63 52.65,34.45 52.65,29.15 53.45,28.35 53.45,24.91 54.55,23.81 54.55,15.2 55.9,13.85 55.9,8.05 54.41,6.56 JP9.3 | 43.95,47.65 43.95,48.19 44.07,48.31 45.59,48.31 45.75,48.16 45.75,40.25
  Bottom 0.254: v41.47,34.31 41.47,36.17 42.55,37.25 42.55,38.75 43.95,40.15 43.95,47.65 | 45.75,40.25 v46.75,39.15
PIO1_16  (via drill 0.4 pad 0.81)
  Top 0.25: 37,37.75 37.7,37.05 38.55,37.05 38.9,36.7 38.9,36.06 U4.48 | v53.1,49.76 51.96,50.9 41.02,50.9 39.82,49.7 v38.78,49.7 | v52.16,25.95 55.73,25.95 v55.85,25.83
  Top 0.254: 37,37.75 v37,40.55
  Bottom 0.25: v53.1,49.76 53.1,46.71 53.12,46.69 53.12,39.7 53.64,39.18 53.64,39.16 53.71,39.09 53.71,37.86 54.08,37.49 55.58,37.49 56.42,36.65 56.42,28.99 56.28,28.85 55.83,28.41 55.37,27.95 55.37,26.33 55.85,25.85 v55.85,25.83 | 53.55,23.98 53.53,23.98 | 53.53,23.98 52.81,24.7 52.81,25.3 v52.16,25.95 | v37,40.55 37,49.22 37.52,49.73 38.74,49.73 v38.78,49.7 | JP9.4 51.87,5.57 54.95,8.65 54.95,13.35 53.7,14.6 53.7,23.81 53.53,23.98
PIO1_19  (via drill 0.4 pad 0.81)
  Top 0.25: U4.2 37.34,33.95 36.1,33.95 35.65,34.4 v35.65,36.5 | v45.45,35.45 45.45,35.85 47.05,37.45 53.47,37.45 v54.59,38.57 | v52.35,23.93 54.69,23.93 55.65,24.89 56.9,24.89 v56.92,24.91
  Bottom 0.25: v35.65,36.5 38.2,36.5 | 44.25,34.25 v45.45,35.45 | v54.59,38.57 55.61,38.57 57,37.18 57,29.94 | 57,29.94 57.02,29.92 | 57,29.94 57,28.65 56.98,28.65 55.96,27.63 55.96,26.92 55.98,26.92 56.9,26 56.9,24.93 v56.92,24.91 | v52.35,23.93 52.55,23.73 52.55,14.25 53.9,12.95 53.9,9.45 49.33,4.88 JP9.5
  Bottom 0.254: 44.25,34.25 42.9,34.25 42.05,33.4 41.15,33.4 40.45,34.1 40.45,34.25 38.2,36.5
PIO1_20  (via drill 0.4 pad 0.81)
  Top 0.25: 25.7,27.6 v25,28.3 | U4.13 37.56,27.43 v37.54,27.41 | 28.45,27.15 28.47,27.13 28.47,21 29.32,20.15 29.32,13.94 29.3,13.92 29.3,5.85
  Top 0.254: 25.7,27.6 28,27.6 28.45,27.15 | JP11.1 26.44,2.99 29.3,5.85
  Bottom 0.25: v25,28.3 36.65,28.3 v37.54,27.41
PIO1_21  (via drill 0.4 pad 0.81)
  Top 0.25: U4.26 48.22,29.48 v48.6,29.1 | v30.1,22.4 30.1,21.2 30.45,20.85 30.45,5.2
  Top 0.254: JP11.2 28.98,3.73 30.45,5.2
  Bottom 0.25: v48.6,29.1 48.6,21.45 48,20.85 33.15,20.85 31.6,22.4 v30.1,22.4
PIO1_22  (via drill 0.4 pad 0.81)
  Top 0.25: U4.38 43.93,38.08 v44.75,38.9
  Top 0.254: v31.1,21.55 31.1,4.3 31.55,3.85 31.55,1.78 JP11.3
  Bottom 0.25: v44.75,38.9 43.95,38.1 | 49.35,31.75 49.35,21.35 48.15,20.15 32.5,20.15 v31.1,21.55
  Bottom 0.254: 43.95,38.1 43.95,37.15 44.35,36.75 46.05,36.75 46.75,36.05 46.75,34.65 49.35,32.05 49.35,31.75
PIO1_23  (via drill 0.4 pad 0.81)
  Top 0.25: U4.18 41.43,26.03 41.08,25.64 | 41.08,25.64 40.9,25.44 | 35.05,11.15 35.05,21.65 36.25,22.85 38.29,22.85 41.08,25.64
  Top 0.254: 35.05,11.15 35.66,10.54 v37.75,10.54
  Bottom 0.254: v37.75,10.54 36.97,10.52 34.08,7.63 34.08,1.77 JP11.4
PIO1_24  (via drill 0.4 pad 0.81)
  Top 0.25: U4.21 42.93,24.42 43.7,23.65 v44.65,23.65 | v29.3,25.35 32.15,22.5 32.15,9.5 35.15,6.5 35.85,6.5 36.25,6.1
  Top 0.254: 29.25,25.35 v29.3,25.35 | JP11.5 36.6,5.75 36.25,6.1
  Bottom 0.25: v44.65,23.65 44.1,23.1 36.6,23.1 34.35,25.35
  Bottom 0.254: 34.35,25.35 v29.3,25.35
PIO1_25
  Top 0.25: 28.15,28.2 26.4,28.2 23.9,30.7 23.9,31.85 28.2,36.15 31.8,36.15 32.4,35.55 32.4,35.2 32.7,34.9 33.9,34.9 34.1,35.1 34.1,36.95 34.6,37.45 36.25,37.45 36.6,37.1 36.6,35.9 36.35,35.65 36.35,34.9 36.77,34.48 U4.1 | 32.95,9.65 35.4,7.2 38.65,7.2
  Top 0.254: 28.15,28.2 30.35,26 30.35,25.05 32.75,22.65 32.75,9.85 32.95,9.65 | 38.65,7.2 39.14,6.71 JP11.6
PIO1_26  (1 unrouted)
  Top 0.25: 37.36,29.5 U4.11 37.34,29.45 35.85,29.45 35.65,29.25 35.65,25.55 35.05,24.95 33.65,24.95 33.4,24.7 33.4,10 35.6,7.8 40.6,7.8
  Top 0.254: 41.62,1.81 41.62,6.78 40.6,7.8
PIO1_27  (1 unrouted)
  Top 0.25: U4.12 36.39,28.98 36.25,28.85 36.25,24.81 35.68,24.25 34.25,24.25 33.9,23.9 33.9,10.45 35.95,8.4 43.45,8.4 43.9,7.95
  Top 0.254: JP11.8 44.22,7.63 43.9,7.95
PIO1_28  (via drill 0.4 pad 0.81)
  Top 0.25: U4.24 44.43,26.47 45.6,25.3 v46.65,25.3 | v34.8,22.7 34.4,22.3 34.4,10.85 36.2,9.05 45.8,9.05 46.41,8.44
  Top 0.254: JP11.9 46.76,8.09 46.41,8.44
  Bottom 0.25: v46.65,25.3 46.65,22.55 46.15,22.05 35.4,22.05 34.8,22.65 v34.8,22.7
PIO1_29/SCK  (via drill 0.4 pad 0.81)  (1 unrouted)
  Top 0.25: U4.31 50.17,31.98 v50.6,32.41
  Bottom 0.25: v50.6,32.41 50.6,49.85
  Bottom 0.254: 54.35,57.82 54.35,55.75 50.6,52 50.6,49.85
PIO1_31/LED  (via drill 0.4 pad 0.81)
  Top 0.25: R8.2 26.93,13.57 27.4,14.05 27.4,18.65 26.6,19.45 v26.6,23.4 | U4.25 47.42,28.98 47.75,28.65 v47.75,27.95
  Bottom 0.25: v47.75,27.95 47.75,22.05 47.2,21.5 33.5,21.5 31.6,23.4 v26.6,23.4
USBD+  (via drill 0.4 pad 0.81)
  Top 0.25: U4.20 42.43,23.93 v42.4,23.9 | v23.9,22.65 R10.2
  Top 0.254: U4.20
  Bottom 0.25: v23.9,22.65 27.4,26.2 34.35,26.25 36.86,23.74 42.24,23.74 v42.4,23.9
USBD-  (via drill 0.4 pad 0.81)
  Top 0.25: 41.95,27.41 U4.19 41.9,27.41 41.9,24.85 v41.65,24.6 | R11.2 23.88,24.78 v23.9,24.8
  Top 0.254: 41.94,27.42 U4.19
  Bottom 0.25: v23.9,24.8 25.95,26.8 34.65,26.8 37.02,24.43 41.48,24.43 v41.65,24.6
VCC
  Top 1.016: JP12.3 3.95,39.65 5.65,41.35 5.65,46.51 D2.C
XTALIN
  Top 0.25: U4.6 32.26,31.98 | 27.68,33.17 Y2.2 27.66,33.16 28.51,33.16 29,33.65 | C1.2 31.07,33.21
  Top 0.254: 32.26,31.98 31.45,32.79 31.45,32.88 C1.2 30.68,33.65 29,33.65
XTALOUT
  Top 0.25: U4.7 32.08,31.48 | 27.24,30.47 Y2.1
  Top 0.254: 27.24,30.47 30.96,30.47 C14.2 31.09,31.04 31.54,31.49 32.07,31.49 32.08,31.48

## Text on the board
tPlace: + | 6-12V | GND | TXD | RXD | SDA | SCL | AD3 | AD2 | AD1 | AD0 | SSEL | SCK | MOSI | MISO | UART | I2C | PIO0_20 | PIO0_21 | PIO0_22 | PIO0_23 | ADC | PIO0_17 | PIO0_7 | SPI | D2 | v1.0 | LPC1347 | R2 | R3 | R4 | C7 | R5 | U2 | C12 | WAKEUP | C3 | DC | C2 | USB | 12MHz | C1 | C4 | USB | R7 | JTAG | R14 | C14 | R11 | C8 | R10 | U3 | R19 | R6 | R13 | USB | ISP | Q1 | C5 | R9 | C11 | POWER | R8 | R1 | R12 | LED | RESET | R15 | BOOTLOADER | D1 | PWR | C13 | GND | 5.0V | 3.3V | PIO1_20 | PIO1_21 | PIO1_22 | PIO1_23 | PIO1_24 | PIO1_25 | PIO1_26 | PIO1_27 | PIO1_28 | PIO1_13 | PIO1_14 | PIO1_15 | PIO1_16 | PIO1_17
bPlace: Based on the project / * LPC1343 ref. board * / MicroBuilder.eu / (CC BY-SA 3.0)